# Altium PCB PCB1.PcbDoc
Units mil, origin at the board's own origin, x right, y up, seen from the top; angles counter-clockwise.
Board outline 6000 x 4000 mil, 2 copper layers (Top Layer, Bottom Layer); 6 components, 4 nets, 13 pads, 0 vias.
Unrouted connection lines stored in the file: 9.
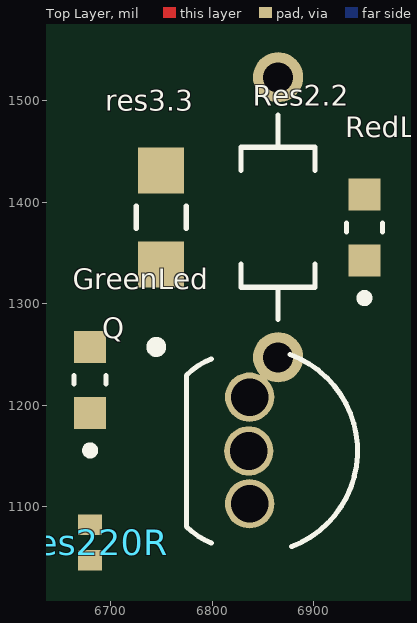
[diagram p0: Top Layer view]
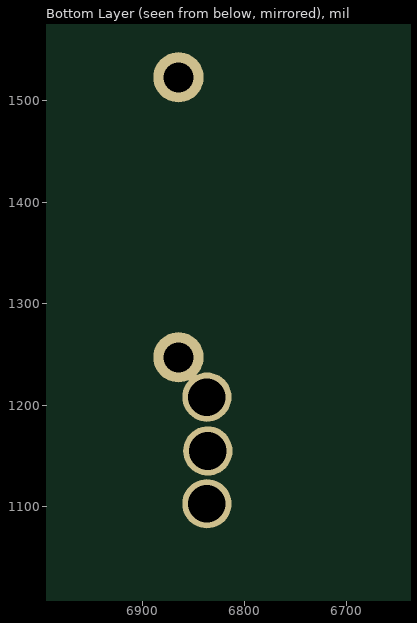
[diagram p1: Bottom Layer view, seen from below]

## Layer stack, top to bottom
Top Solder: solder mask 0.4, Solder Resist, Dk 3.5
Top Layer: signal copper 1.4
Dielectric 1: dielectric 12.6, FR-4, Dk 4.8
Bottom Layer: signal copper 1.4
Bottom Solder: solder mask 0.4, Solder Resist, Dk 3.5

## Board outline
1000,1000 7000,1000 7000,5000 1000,5000

## Design rules (kind name [scope] priority, off if disabled: settings)
Clearance [All] p1: gap=10 ignorepadtopadclearanceinfootprint=FALSE except(0: Arc-Hole Track-Hole SMDPad-Hole THPad-Hole Via-Hole Fill-Hole Poly-Hole Region-Hole Text-Hole)
PolygonConnect [All] p1: connectstyle=Relief reliefconductorwidth=10 reliefentries=4 polygonreliefangle="90 Angle" airgapwidth=10
RoomDefinition Sheet1 [InComponentClass('Sheet1')] p1: confinementstyle=ConfineIn formatcopy=TRUE lockcomponents=FALSE outline 7045,1060 7385,1060 7385,1360 7045,1360
RoutingVias [All] p1: holewidth=28 width=50 viastyle="Through Hole" minholewidth=28 minwidth=50 maxholewidth=28 maxwidth=50
SolderMaskExpansion [All] p1: expansion=4 istentingtop=FALSE
Width [All] p1: maxlimit=10 minlimit=10 preferedwidth=10
30 further rules are at their usual default settings.

## Components (designator, comment, footprint, x,y, rotation, side; value= is the part's Value field where it differs from the comment)
GreenLed "GREENLED" LED_GREEN 6680,1225 r90 top
Q "BC547A" BC547B 6875,1155 r270 top
RedLed "REDLED" LED_RED 6950,1375 r90 top (schematic designator Red)
Res2.2 "RES2.2K" RES2.2K 6865,1385 r90 top
res3.3 "RES3.3K" RES_3.3K 6750,1385 r90 top
Res220R "RES220R" RES_220R 6680,1065 r90 top

## Footprints (in the part's own frame and the unit in brackets; to place one, negate y for a bottom-side part, rotate by r counter-clockwise, add the part's x,y. Pads: shape width x height; smd on the part's side, far side on the other; paste and mask are expansions set on the pad)
BC547B [mil]
  round 48.51 hole 37.01: 1(-53,-38) 2(0,-38.88) 3(52,-38)
  silkscreen extent -106,-134 94,68, body extent -95,-132 95,12, height 220
LED_GREEN [mm]
  rect 0.8x0.8 smd: A(0.825,0) C(-0.825,0)
  silkscreen extent -1.86,-0.4 0.11,0.4, body extent -0.8,-0.4 0.8,0.4, height 0.55
LED_RED [mm]
  rect 0.8x0.8 smd: A(0.825,0) C(-0.825,0)
  silkscreen extent -1.86,-0.45 0.11,0.45
RES2.2K [mm]
  round 1.258 hole 0.75: 1(-3.5,0) 2(3.5,0)
  silkscreen extent -2.55,-0.92 2.55,0.92, body extent -29.75,-0.92 29.75,0.93, height 2.19
RES_3.3K [mm]
  rect 1.15x1.15 smd: 1(-1.175,0) 2(1.175,0)
  silkscreen extent -0.28,-0.63 0.28,0.63, body extent -1,-0.63 1,0.63, height 0.6
RES_220R [mm]
  rect 0.51x0.6 smd: 1(-0.445,0) 2(0.445,0)

## Part data
GreenLed: "Green 565nm LED Indication - Discrete 2.2V 0603 (1608 Metric)", Package="0603 Rohm", Supplier Part Number 1=846-1176-2-ND, Availability=Good, Check_prices=https://www.snapeda.com/parts/SML-D12FWT86/Rohm/view-part/2753923/?ref=eda, MF=Rohm, MP=SML-D12FWT86, Price=None, Purchase-URL=https://pricing.snapeda.com/search/part/SML-D12FWT86/?ref=eda, SnapEDA_Link=https://www.snapeda.com/parts/SML-D12FWT86/Rohm/view-part/2753923/?ref=snap, Supplier 1=Digi-Key
Q: "Bipolar _BJT_ Transistor NPN 45V 100mA 300MHz 500mW Through Hole TO-92-3", Package="TO-92 NXP Semiconductors", Availability=Unavailable, MF="ON Semiconductor", MP=BC547A, Price=None, SnapEDA_Link=https://www.snapeda.com/parts/BC547A/ON%20Semiconductor/view-part/805861/?ref=snap
RedLed: "Red 620nm LED Indication - Discrete 2.2V 0603 _1608 Metric_", Package="0603 Rohm", Supplier Part Number 1=SML-D12U1WT86TR-ND, Availability=Unavailable, MF=Rohm, MP=SML-D12U1WT86, Price=None, SnapEDA_Link=https://www.snapeda.com/parts/SML-D12U1WT86/Rohm/view-part/481503/?ref=snap, Supplier 1=Digi-Key
Res2.2: "RES 2.2K OHM 0.1% 1/8W 0805", Package="2012-2 Panasonic", Supplier Part Number 1=A105880TB-ND, Availability="In Stock", Check_prices=https://www.snapeda.com/parts/ERA-6APB222V/Panasonic/view-part/3718729/?ref=eda, MF=Panasonic, MP=ERA-6APB222V, Price=None, SnapEDA_Link=https://www.snapeda.com/parts/ERA-6APB222V/Panasonic/view-part/3718729/?ref=snap, Supplier 1=Digi-Key
res3.3: "RES 3.3K OHM 0.1% 1/8W 0805", Package="2012-2 Panasonic", Supplier Part Number 1=6620473, Availability="In Stock", Check_prices=https://www.snapeda.com/parts/ERA6ARB332V/Panasonic/view-part/5767158/?ref=eda, MF=Panasonic, MP=ERA6ARB332V, Price=None, SnapEDA_Link=https://www.snapeda.com/parts/ERA6ARB332V/Panasonic/view-part/5767158/?ref=snap, Supplier 1=RSComponents
Res220R: Package=None, Supplier Part Number 1=2379832, Availability=Unavailable, MP=ERJ-2RHD2200X, Price=None, Supplier 1=Farnell

## Nets (pads, with @x,y where several pads share a name; then routed paths per layer and width w, separated by ;. In a path a pad name is that pad's centre, name@x,y a point inside that pad or via, vN(x,y) a via of type N, cw(c..) or ccw(c..) an arc to the next point about the centre after c; other vN are vias at no path point)
GND: GreenLed.C Q.3 Res2.2.2 Res220R.1
NetGreenLed_A: GreenLed.A RedLed.A res3.3.2
NetQ_1: Q.1 RedLed.C
NetQ_2: Q.2 Res2.2.1 res3.3.1 Res220R.2